# Altium PCB minna_pcb.PcbDoc (part 1 of 2)
Units mil, origin at the board's own origin, x right, y up, seen from the top; angles counter-clockwise.
Board outline 3700 x 2200 mil, 4 copper layers (Top Layer, Power Plane, Ground Plane, Bottom Layer), stack 61.6 mil thick; 144 components, 126 nets, 666 pads, 364 vias.
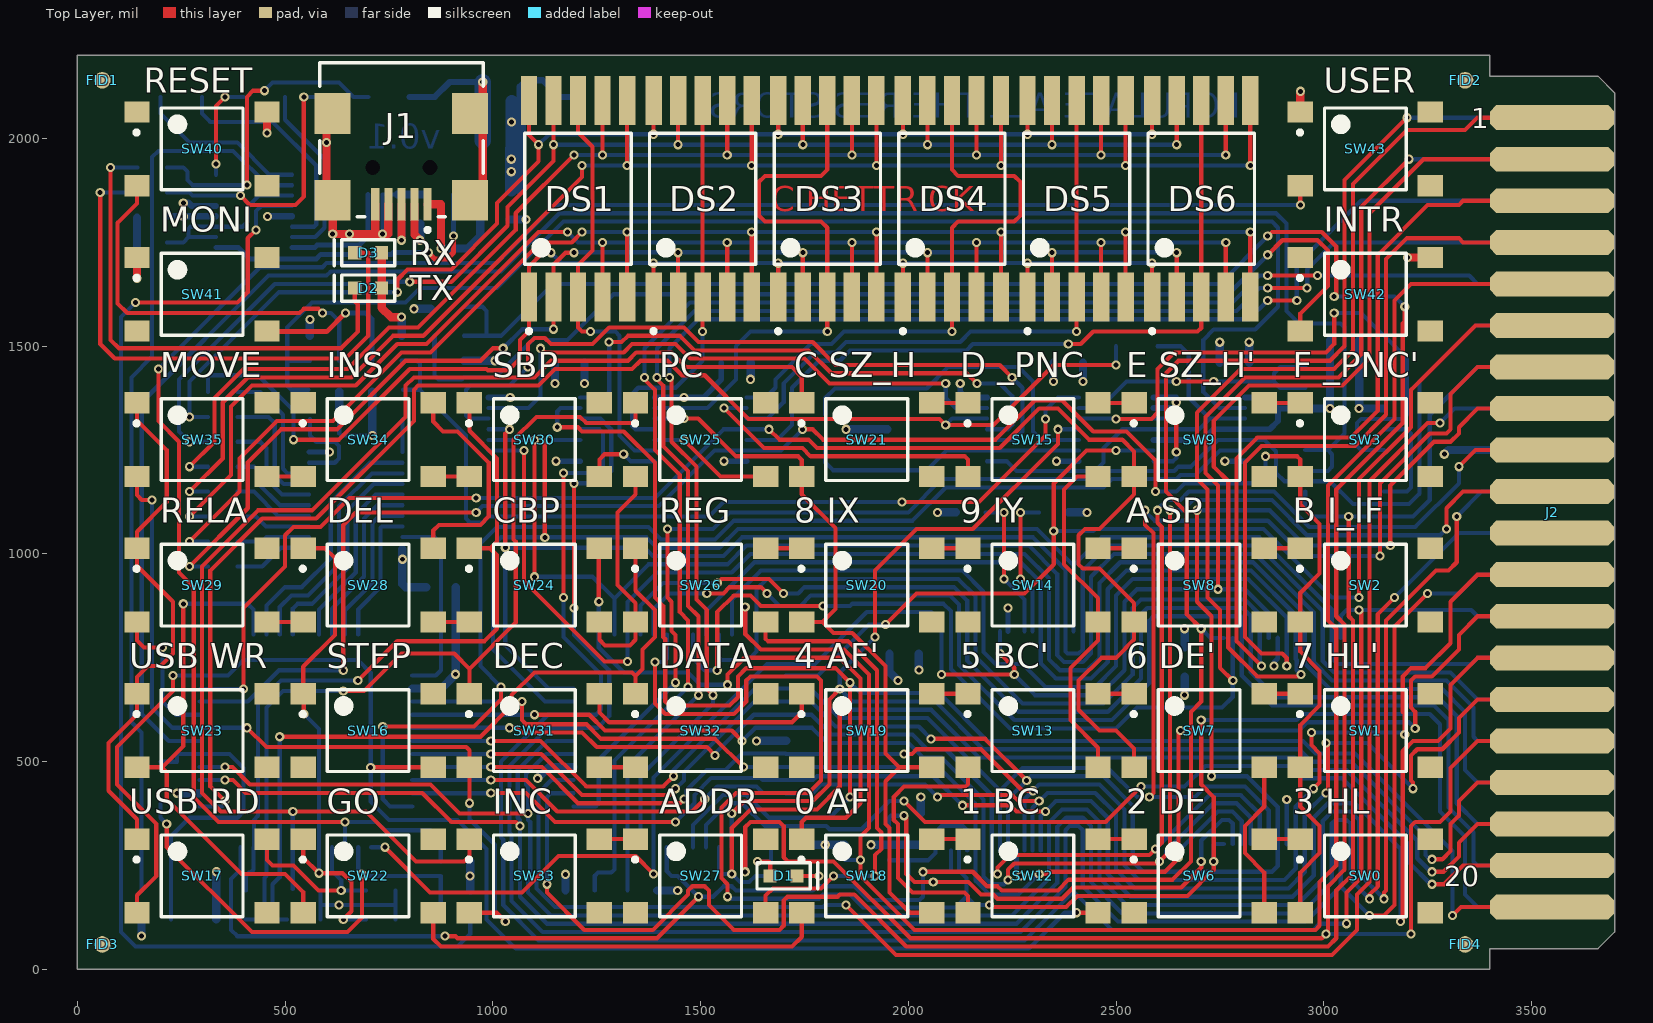
[diagram p0: Top Layer view]
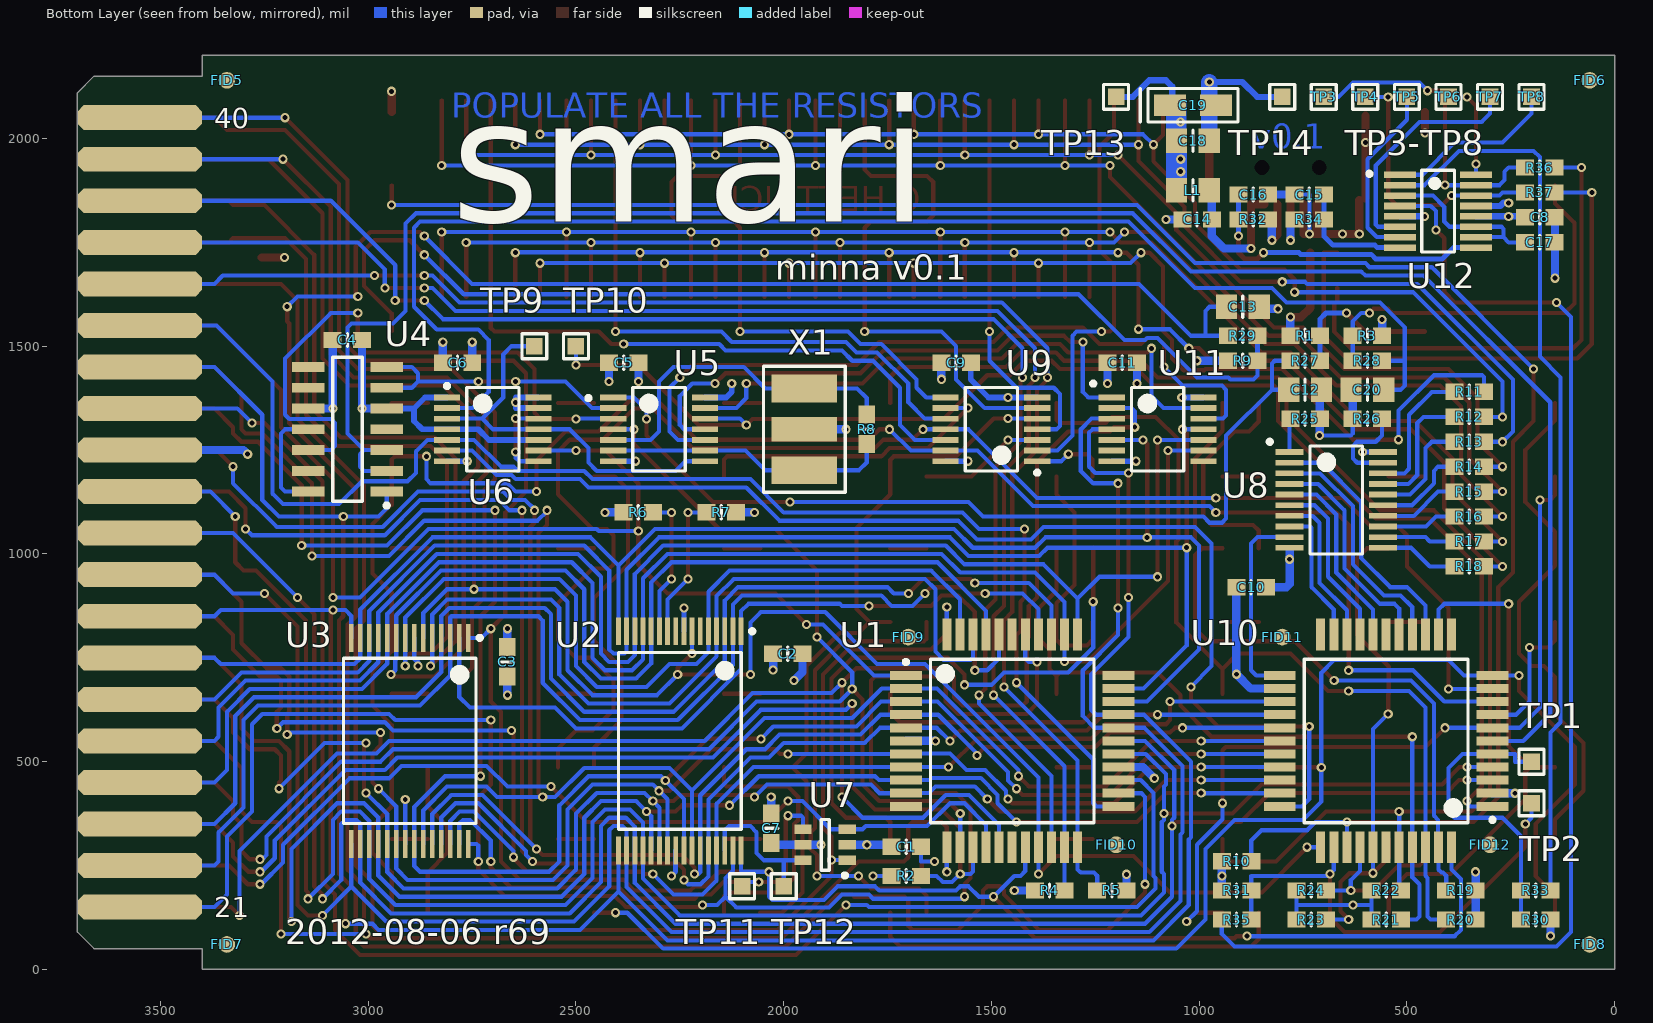
[diagram p1: Bottom Layer view, seen from below]
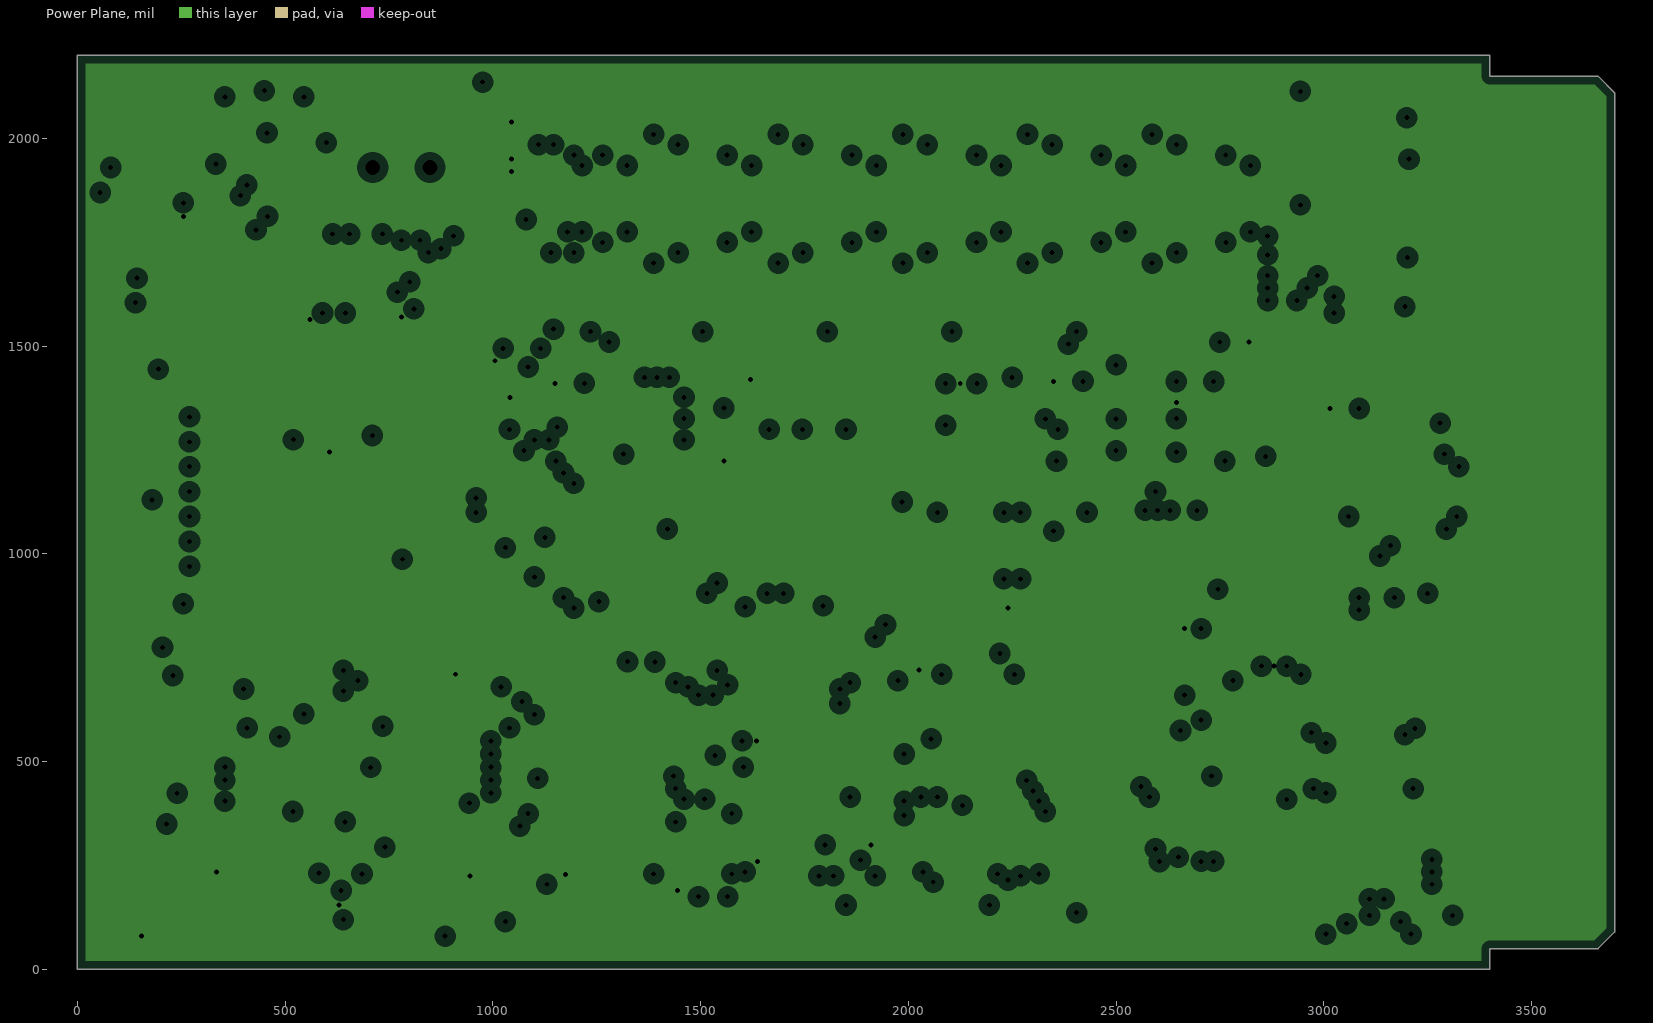
[diagram p2: Power Plane, clearances drawn from the general rule]
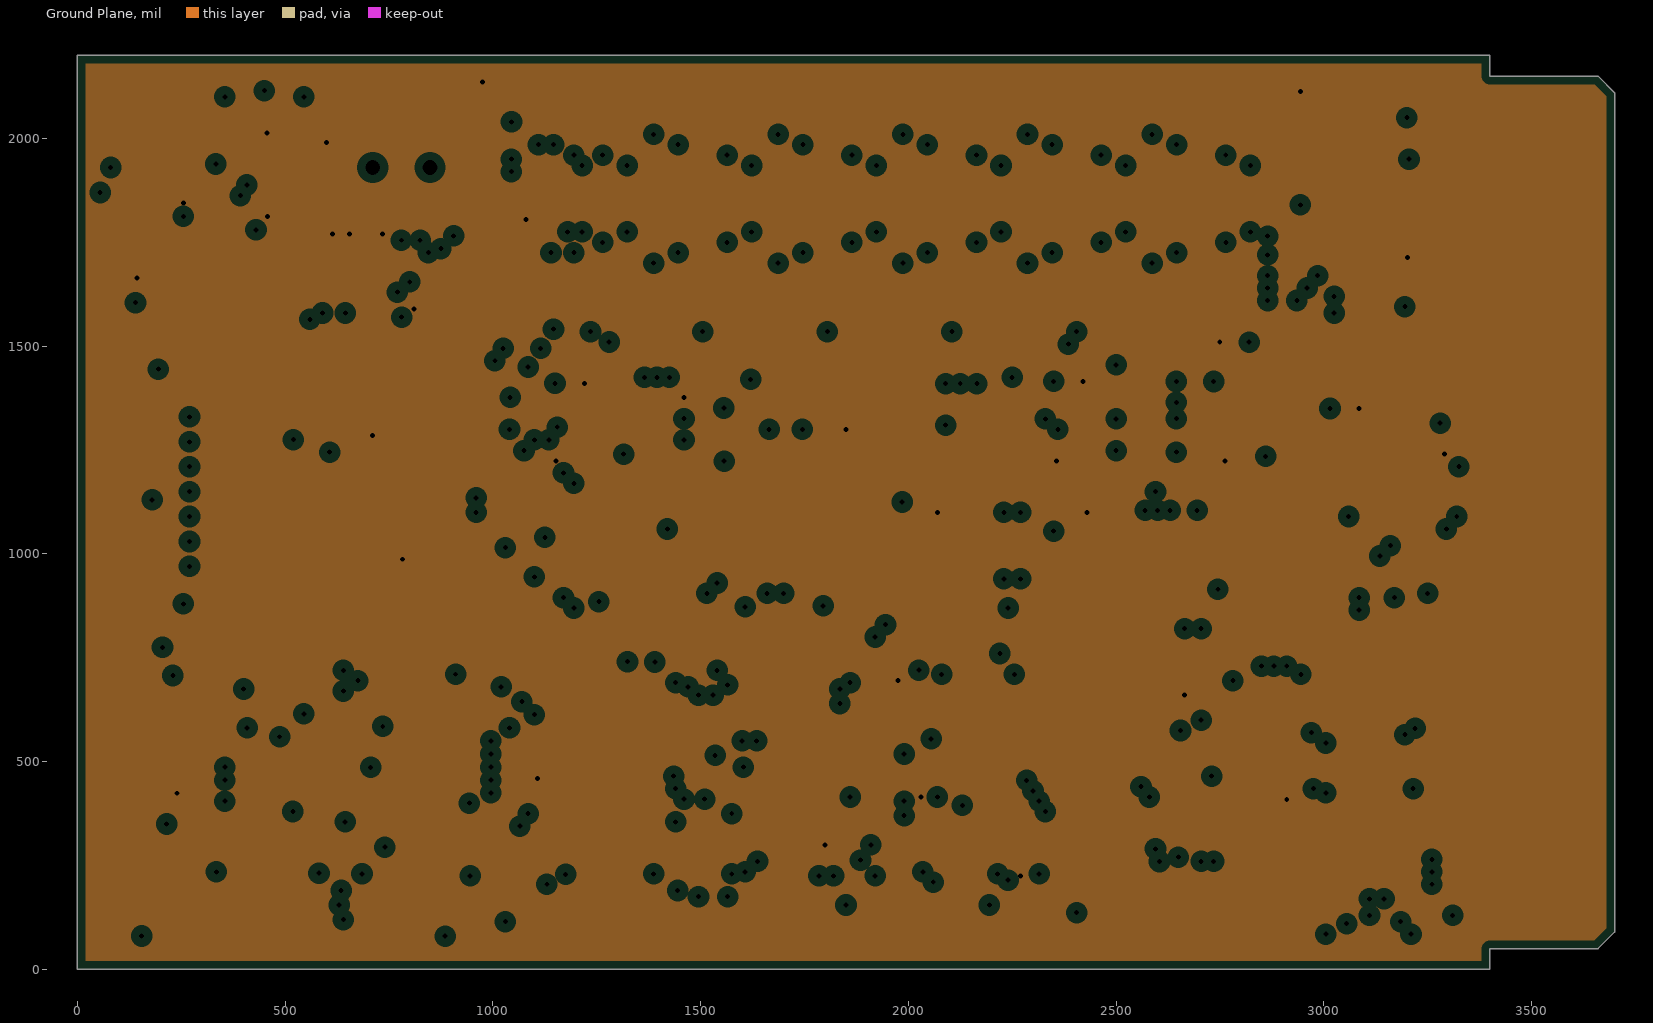
[diagram p3: Ground Plane, clearances drawn from the general rule]

## Layer stack, top to bottom
Top Layer: signal copper 2.1
Dielectric: core 14, FR-4, Dk 4.2
Power Plane: plane copper 0.7, net VCC
Dielectric: prepreg 28, FR-4, Dk 4.2
Ground Plane: plane copper 0.7, net GND
Dielectric: core 14, FR-4, Dk 4.2
Bottom Layer: signal copper 2.1

## Board outline
0,0 3400,0 3400,50 3660,50 3700,90 3700,2110 3660,2150 3400,2150 3400,2200 0,2200 0,0

## Design rules (kind name [scope] priority, off if disabled: settings)
AcuteAngle [All] p1 off: minimum=9.00000000000000E+0001
Clearance "Clearance Poly" [All vs (InPolygon)] p1: gap=11.81
Clearance "Clearance All" [All] p2: gap=7
Clearance "Clearance xtal" [(InComponent('X1')) vs InNet('NetR8_1') AND InNet('NetR8_2')] p3: gap=0 // SMD crystal clearance
DiffPairsRouting [All] p1 off: maxlimit=10 minlimit=10 mostfreqgap=10 maxuncoupledlength=500
FabricationTestPointUsage TestPointUsage [All] p1 off: valid=0 allowmultiple=TRUE
FabricationTestpoint Testpoint [(IsPad And (OnTopLayer Or OnBottomLayer))] p1 off: side=3 testpointundercomponent=TRUE minsize=40 maxsize=100 preferedsize=60 minholesize=0 maxholesize=40 preferedholesize=32 testpointgrid=5 allowsidetop=TRUE allowsidebottom=TRUE usegrid=TRUE gridtolerance=0.01
FanoutControl Fanout_BGA [IsBGA] p1 off: bgadir=Out bgaviamode=Centered fanoutstyle=Auto fanoutdirection=Alternating viagrid=1 // Fanout_BGA (Default Rule)
FanoutControl Fanout_LCC [IsLCC] p2 off: bgadir=Out bgaviamode=Centered fanoutstyle=Auto fanoutdirection=Alternating viagrid=1 // Fanout_LCC (Default Rule)
FanoutControl Fanout_SOIC [IsSOIC] p3 off: bgadir=Out bgaviamode=Centered fanoutstyle=Auto fanoutdirection=Alternating viagrid=1 // Fanout_SOIC (Default Rule)
FanoutControl Fanout_Small [(CompPinCount < 5)] p4 off: bgadir=Out bgaviamode=Centered fanoutstyle=Auto fanoutdirection=OutThenIn viagrid=1 // Fanout_Small (Default Rule)
FanoutControl Fanout_Default [All] p5 off: bgadir=Out bgaviamode=Centered fanoutstyle=Auto fanoutdirection=Alternating viagrid=1 // Fanout_Default (Default Rule)
Height [All] p1 off: minheight=0 maxheight=1000 prefheight=500
HoleSize [All] p1: absolutevalues=TRUE maxlimit=250 minlimit=10 maxpercent=80.000 minpercent=20.000
MinimumAnnularRing "MinimumAnnularRing Via" [(IsVia)] p1: minimumring=5
MinimumAnnularRing "MinimumAnnularRing Pad" [All] p2: minimumring=10
MinimumSolderMaskSliver [All] p1: minsoldermaskwidth=4
PlaneClearance PlaneClearance_1 [ISVIA] p1: clearance=15
PlaneClearance [All] p2: clearance=20
PlaneConnect "PlaneConnect Via" [(IsVia)] p1: planeconnectstyle=Direct reliefexpansion=20 reliefentries=4 reliefconductorwidth=10 reliefairgap=10
PlaneConnect "PlaneConnect Pad" [All] p2: planeconnectstyle=Relief reliefexpansion=15 reliefentries=4 reliefconductorwidth=15 reliefairgap=15
PolygonConnect [All] p1: connectstyle=Relief reliefconductorwidth=10 reliefentries=4 polygonreliefangle="90 Angle"
RoutingCorners [All] p1 off: cornerstyle=45-Degree minsetback=100 maxsetback=100
RoutingPriority [All] p1: routingpriority=1
RoutingVias [All] p1: holewidth=12 width=22 viastyle="Through Hole" minholewidth=12 minwidth=22 maxholewidth=12 maxwidth=22
SMDToCorner [All] p1: distance=90000
SilkscreenOverComponentPads [All] p1: minsilkscreentomaskgap=5
SolderMaskExpansion SolderMaskExpansion_VIA [Isvia] p1: expansion=-50
SolderMaskExpansion [All] p2: expansion=0
Width "Width Power" [InNetClass('Power')] p1: maxlimit=100 minlimit=20 preferedwidth=50
Width [All] p2: maxlimit=100 minlimit=10 preferedwidth=15
12 further rules are at their usual default settings.

## Classes and differential pairs
component class minna_schematic_cpu: C1 C2 C3 C4 C5 C6 C7 C8 C9 C10 C11 C12 C13 C18 C19 C20 D1 FID1 FID2 FID3 FID4 FID5 FID6 FID7 FID8 FID9 FID10 FID11 FID12 J2 R1 R2 R3 R4 R5 R6 R7 R8 R9 R10 R27 R28 R29 SW40 SW41 SW42 SW43 TP9 TP10 TP11 TP12 U1 U2 U3 U4 U5 U6 U7 U11 X1
component class minna_schematic_io: C14 C15 C16 C17 C?? D1 D3 D?? DS1 DS2 DS3 DS4 DS5 DS6 J1 L1 R11 R12 R13 R14 R15 R16 R17 R18 R19 R20 R21 R22 R23 R24 R25 R26 R30 R31 R32 R33 R34 R35 R36 R37 R?? SW0 SW1 SW2 SW3 SW6 SW7 SW8 SW9 SW12 SW13 SW14 SW15 SW16 SW17 SW18 SW19 SW20 SW21 SW22 SW23 SW24 SW25 SW26 SW27 SW28 SW29 SW30 SW31 SW32 SW33 SW34 SW35 TP1 TP2 TP3 TP4 TP5 TP6 TP7 TP8 TP13 TP14 U8 U9 U10 U12

## Components (designator, comment, footprint, x,y, rotation, side; value= is the part's Value field where it differs from the comment)
C1 "0.1uF" 0603 1705,295 r180 bottom
C2 "0.1uF" 0603 1990,760 r0 bottom
C3 "0.1uF" 0603 2665,740 r90 bottom
C4 "0.1uF" 0603 3050,1515 r180 bottom
C5 "0.1uF" 0603 2385,1460 r180 bottom
C6 "0.1uF" 0603 2785,1460 r0 bottom
C7 "0.1uF" 0603 2030,340 r270 bottom
C8 "0.1uF" 0603 180,1810 r0 bottom
C9 "0.1uF" 0603 1585,1460 r0 bottom
C10 "0.1uF" 0603 875,920 r0 bottom
C11 "0.1uF" 0603 1185,1460 r180 bottom
C12 "1.0uF" 0805 745,1395 r0 bottom
C13 "1.0uF" 0805 895,1595 r0 bottom
C14 "10nF" 0603 1005,1805 r0 bottom
C15 "47pF" 0603 735,1865 r0 bottom
C16 "47pF" 0603 870,1865 r180 bottom
C17 "0.1uF" 0603 180,1750 r0 bottom
C18 "1.0uF" 0805 1015,1995 r180 bottom
C19 "10uF" 1206_A 1015,2080 r180 bottom
C20 "1.0uF" 0805 595,1395 r180 bottom
D1 "HALT" APG1608 1700,225 r0 top
D2 "TX" APG1608 700,1640 r180 top
D3 "RX" APG1608 700,1725 r180 top
DS1 "ACSC03-41EWA-F01" ACSC03-41EWA-F01 1205,1855 r0 top
DS2 "ACSC03-41EWA-F01" ACSC03-41EWA-F01 1505,1855 r0 top
DS3 "ACSC03-41EWA-F01" ACSC03-41EWA-F01 1805,1855 r0 top
DS4 "ACSC03-41EWA-F01" ACSC03-41EWA-F01 2105,1855 r0 top
DS5 "ACSC03-41EWA-F01" ACSC03-41EWA-F01 2405,1855 r0 top
DS6 "ACSC03-41EWA-F01" ACSC03-41EWA-F01 2705,1855 r0 top
FID1 "Fiducial" FIDUCIAL 60,2140 r90 top
FID2 "Fiducial" FIDUCIAL 3340,2140 r90 top
FID3 "Fiducial" FIDUCIAL 60,60 r90 top
FID4 "Fiducial" FIDUCIAL 3340,60 r90 top
FID5 "Fiducial" FIDUCIAL 3340,2140 r90 bottom
FID6 "Fiducial" FIDUCIAL 60,2140 r90 bottom
FID7 "Fiducial" FIDUCIAL 3340,60 r90 bottom
FID8 "Fiducial" FIDUCIAL 60,60 r90 bottom
FID9 "Fiducial" FIDUCIAL 1700,800 r90 bottom
FID10 "Fiducial" FIDUCIAL 1200,300 r90 bottom
FID11 "Fiducial" FIDUCIAL 800,800 r90 bottom
FID12 "Fiducial" FIDUCIAL 300,300 r90 bottom
J1 "UX60-MB-5ST" UX60-MB-5ST 780,1930 r90 top
J2 "CWR-170-40-0000" "CARD EDGE 40 PIN" 3550,1100 r90 top
L1 "MI0805K601R-10" 0805 1015,1875 r0 bottom
R1 "47.0K" 0603 745,1525 r0 bottom
R2 "10K" 0603 1705,225 r180 bottom
R3 "47.0K" 0603 595,1525 r180 bottom
R4 "10K" 0603 1360,190 r180 bottom
R5 "10K" 0603 1210,190 r0 bottom
R6 "10K" 0603 2350,1100 r180 bottom
R7 "10K" 0603 2150,1100 r0 bottom
R8 "1.0M" 0603 1800,1300 r270 bottom
R9 "47.0K" 0603 895,1465 r0 bottom
R10 "10K" 0603 910,260 r0 bottom
R11 "680R" 0603 350,1390 r180 bottom
R12 "680R" 0603 350,1330 r180 bottom
R13 "680R" 0603 350,1270 r180 bottom
R14 "680R" 0603 350,1210 r180 bottom
R15 "680R" 0603 350,1150 r180 bottom
R16 "680R" 0603 350,1090 r180 bottom
R17 "680R" 0603 350,1030 r180 bottom
R18 "680R" 0603 350,970 r180 bottom
R19 "10K" 0603 370,190 r180 bottom
R20 "10K" 0603 370,120 r180 bottom
R21 "10K" 0603 550,120 r0 bottom
R22 "10K" 0603 550,190 r0 bottom
R23 "10K" 0603 730,120 r0 bottom
R24 "10K" 0603 730,190 r0 bottom
R25 "10K" 0603 745,1325 r180 bottom
R26 "10K" 0603 595,1325 r0 bottom
R27 "18.0K" 0603 745,1465 r0 bottom
R28 "18.0K" 0603 595,1465 r180 bottom
R29 "18.0K" 0603 895,1525 r0 bottom
R30 "1.0K" 0603 190,120 r180 bottom
R31 "1.0K" 0603 910,190 r0 bottom
R32 "27R" 0603 870,1805 r0 bottom
R33 "160R" 0603 190,190 r0 bottom
R34 "27R" 0603 735,1805 r180 bottom
R35 "160R" 0603 910,120 r180 bottom
R36 "680R" 0603 180,1930 r180 bottom
R37 "680R" 0603 180,1870 r0 bottom
SW0 "3 HL" "PTS645SM43SMTR LFS" 3100,225 r0 top
SW1 "7 HL'" "PTS645SM43SMTR LFS" 3100,575 r0 top
SW2 "B I_IF" "PTS645SM43SMTR LFS" 3100,925 r0 top
SW3 "F _PNC'" "PTS645SM43SMTR LFS" 3100,1275 r0 top
SW6 "2 DE" "PTS645SM43SMTR LFS" 2700,225 r0 top
SW7 "6 DE'" "PTS645SM43SMTR LFS" 2700,575 r0 top
SW8 "A SP" "PTS645SM43SMTR LFS" 2700,925 r0 top
SW9 "E SZ_H'" "PTS645SM43SMTR LFS" 2700,1275 r0 top
SW12 "1 BC" "PTS645SM43SMTR LFS" 2300,225 r0 top
SW13 "5 BC'" "PTS645SM43SMTR LFS" 2300,575 r0 top
SW14 "9 IY" "PTS645SM43SMTR LFS" 2300,925 r0 top
SW15 "D _PNC" "PTS645SM43SMTR LFS" 2300,1275 r0 top
SW16 "STEP" "PTS645SM43SMTR LFS" 700,575 r0 top
SW17 "USB RD" "PTS645SM43SMTR LFS" 300,225 r0 top
SW18 "0 AF" "PTS645SM43SMTR LFS" 1900,225 r0 top
SW19 "4 AF'" "PTS645SM43SMTR LFS" 1900,575 r0 top
SW20 "8 IX" "PTS645SM43SMTR LFS" 1900,925 r0 top
SW21 "C SZ_H" "PTS645SM43SMTR LFS" 1900,1275 r0 top
SW22 "GO" "PTS645SM43SMTR LFS" 700,225 r0 top
SW23 "USB WR" "PTS645SM43SMTR LFS" 300,575 r0 top
SW24 "CBP" "PTS645SM43SMTR LFS" 1100,925 r0 top
SW25 "PC" "PTS645SM43SMTR LFS" 1500,1275 r0 top
SW26 "REG" "PTS645SM43SMTR LFS" 1500,925 r0 top
SW27 "ADDR" "PTS645SM43SMTR LFS" 1500,225 r0 top
SW28 "DEL" "PTS645SM43SMTR LFS" 700,925 r0 top
SW29 "RELA" "PTS645SM43SMTR LFS" 300,925 r0 top
SW30 "SBP" "PTS645SM43SMTR LFS" 1100,1275 r0 top
SW31 "DEC" "PTS645SM43SMTR LFS" 1100,575 r0 top
SW32 "DATA" "PTS645SM43SMTR LFS" 1500,575 r0 top
SW33 "INC" "PTS645SM43SMTR LFS" 1100,225 r0 top locked
SW34 "INS" "PTS645SM43SMTR LFS" 700,1275 r0 top
SW35 "MOVE" "PTS645SM43SMTR LFS" 300,1275 r0 top
SW40 "RESET" "PTS645SM43SMTR LFS" 300,1975 r0 top
SW41 "MONI" "PTS645SM43SMTR LFS" 300,1625 r0 top
SW42 "INTR" "PTS645SM43SMTR LFS" 3100,1625 r0 top
SW43 "USER" "PTS645SM43SMTR LFS" 3100,1975 r0 top
TP1 "I2CSCL" TP_ICT 200,500 r90 bottom
TP2 "I2CSDA" TP_ICT 200,400 r90 bottom
TP3 "CBUS0" TP_ICT 700,2100 r90 bottom
TP4 "CBUS1" TP_ICT 600,2100 r90 bottom
TP5 "CBUS2" TP_ICT 500,2100 r90 bottom
TP6 "CBUS3" TP_ICT 400,2100 r90 bottom
TP7 "CBUS4" TP_ICT 300,2100 r90 bottom
TP8 "CBUS5" TP_ICT 200,2100 r90 bottom
TP9 "OSCCLK" TP_ICT 2600,1500 r180 bottom
TP10 "#8255CS" TP_ICT 2500,1500 r90 bottom
TP11 "#RAMCE" TP_ICT 2100,200 r90 bottom
TP12 "#FLASHCE" TP_ICT 2000,200 r90 bottom
TP13 "VCC" TP_ICT 1200,2100 r90 bottom
TP14 "GND" TP_ICT 800,2100 r90 bottom
U1 "Z84C0010AEG" LQFP-44 1450,550 r180 bottom locked
U2 "SST39SF010A-70-4C-WHE" SST39SF010A-70-4C-WHE 2250,550 r270 bottom locked
U3 "IS62C256AL-45TLI" IS62C256AL-45TLI 2900,550 r270 bottom locked
U4 "SN74LS90DG4" DO14 3050,1300 r0 bottom
U5 "SN74HC14PWR" PW014 2300,1300 r180 bottom
U6 "SN74HC74PWR" PW014 2700,1300 r180 bottom
U7 "SN74LVC1G19DBVR" "SOT-23-6 DBV R-PDSO-G6" 1900,300 r0 bottom locked
U8 "SN74HC541PWR" PW020 670,1130 r180 bottom
U9 "SN74HC14PWR" PW014 1500,1300 r0 bottom
U10 "CQ82C55AZ" MQFP-44 550,550 r0 bottom
U11 "CD74HC4002PWR" PW014 1100,1300 r180 bottom
U12 "FT201XS-R" SSOP-16 425,1825 r180 bottom
X1 "AWSCR-3.58MGD-T" AWSCR-MG 1950,1300 r90 bottom

## Footprints (in the part's own frame and the unit in brackets; to place one, negate y for a bottom-side part, rotate by r counter-clockwise, add the part's x,y. Pads: shape width x height; smd on the part's side, far side on the other; paste and mask are expansions set on the pad)
0603 [mm]
  rect 1.1x1 smd: 1(-0.9,0) 2(0.9,0)
  silkscreen extent 0,-0.4 0,0.4, body extent -0.87,-0.47 0.87,0.47, height 0.8
0805 [mm]
  rect 1.3x1.5 smd: 1(-1,0) 2(1,0)
  silkscreen extent 0,-0.65 0,0.65, body extent -1.1,-0.72 1.1,0.72, height 1.27
1206_A [mm]
  rect 1.95x1.3 smd: 1(-1.4,0) 2(1.4,0)
  silkscreen extent -3.23,-1.02 2.75,1.02, body extent -1.6,-0.8 1.6,0.8, height 1.8
ACSC03-41EWA-F01 [mm] "DISPLAY 0.3\" 627NM SGL RED SMD"
  rect 1x3 smd: 1(-3,-6) 2(-1.5,-6) 3(0,-6) 4(1.5,-6) 5(3,-6) 6(3,6) 7(1.5,6) 8(0,6) 9(-1.5,6) 10(-3,6)
  silkscreen extent -3.25,-8.22 3.25,4, body extent -3.65,-6 3.65,6, height 3.75
APG1608 [mm] "1.6mm X 0.8mm SMD LED"
  rect 0.8x0.8 smd: 1(-0.825,0) 2(0.825,0)
  silkscreen extent -1.63,-0.8 2.07,0.8, body extent -0.8,-0.4 0.8,0.4, height 1.8
AWSCR-MG [mm] "CERAMIC RESONATOR 7.4 x 3.4 x 1.8mm 3-SMD"
  rect 1.7x4 smd: 1(-2.5,0) 3(2.5,0)
  rect 1.5x4 smd: 2(0,0)
  silkscreen extent -3.85,-2.5 3.85,2.5, body extent -3.7,-1.7 3.7,1.7, height 1.8
"CARD EDGE 40 PIN" [mil] "CARD EDGE 40 PIN FOR CWR-170-40-0000"
  oct 60x300 smd paste-39.37: 1(950,0) 2(850,0) 3(750,0) 4(650,0) 5(550,0) 6(450,0) 7(350,0) 8(250,0) 9(150,0) 10(50,0) 11(-50,0) 12(-150,0) 13(-250,0) 14(-350,0) 15(-450,0) 16(-550,0) 17(-650,0) 18(-750,0) 19(-850,0) 20(-950,0)
  oct 60x300 smd far side paste-39.37: 21(-950,0) 22(-850,0) 23(-750,0) 24(-650,0) 25(-550,0) 26(-450,0) 27(-350,0) 28(-250,0) 29(-150,0) 30(-50,0) 31(50,0) 32(150,0) 33(250,0) 34(350,0) 35(450,0) 36(550,0) 37(650,0) 38(750,0) 39(850,0) 40(950,0)
DO14 [mm]
  rect 2x0.6 smd: 1(-2.4,3.81) 2(-2.4,2.54) 3(-2.4,1.27) 4(-2.4,0) 5(-2.4,-1.27) 6(-2.4,-2.54) 7(-2.4,-3.81) 8(2.4,-3.81) 9(2.4,-2.54) 10(2.4,-1.27) 11(2.4,0) 12(2.4,1.27) 13(2.4,2.54) 14(2.4,3.81)
  silkscreen extent -2.52,-4.4 0.9,4.78, body extent -2,-4.38 2,4.38, height 1.75
FIDUCIAL [mil] "FIDUCIAL"
  round 40 smd paste-40 mask+20: FID(0,0)
IS62C256AL-45TLI [mm] "IC SRAM 256KBIT 45NS 28TSOP"
  rect 1.7x0.3 smd: 1(-6.3,3.575) 2(-6.3,3.025) 3(-6.3,2.475) 4(-6.3,1.925) 5(-6.3,1.375) 6(-6.3,0.825) 7(-6.3,0.275) 8(-6.3,-0.275) 9(-6.3,-0.825) 10(-6.3,-1.375) 11(-6.3,-1.925) 12(-6.3,-2.475) 13(-6.3,-3.025) 14(-6.3,-3.575) 15(6.3,-3.575) 16(6.3,-3.025) 17(6.3,-2.475) 18(6.3,-1.925) 19(6.3,-1.375) 20(6.3,-0.825) 21(6.3,-0.275) 22(6.3,0.275) 23(6.3,0.825) 24(6.3,1.375) 25(6.3,1.925) 26(6.3,2.475) 27(6.3,3.025) 28(6.3,3.575)
  silkscreen extent -6.42,-4.05 5.05,4.4, body extent -5.95,-4.05 5.95,4.05, height 1.2
LQFP-44 [mm] "44-Lead Plastic Low-Profile Quad Flat Package (10 x 10 x 1.4 mm)"
  rect 1.95x0.55 smd: 1(-6.5,4) 2(-6.5,3.2) 3(-6.5,2.4) 4(-6.5,1.6) 5(-6.5,0.8) 6(-6.5,0) 7(-6.5,-0.8) 8(-6.5,-1.6) 9(-6.5,-2.4) 10(-6.5,-3.2) 11(-6.5,-4) 23(6.5,-4) 24(6.5,-3.2) 25(6.5,-2.4) 26(6.5,-1.6) 27(6.5,-0.8) 28(6.5,0) 29(6.5,0.8) 30(6.5,1.6) 31(6.5,2.4) 32(6.5,3.2) 33(6.5,4)
  rect 0.55x1.95 smd: 12(-4,-6.5) 13(-3.2,-6.5) 14(-2.4,-6.5) 15(-1.6,-6.5) 16(-0.8,-6.5) 17(0,-6.5) 18(0.8,-6.5) 19(1.6,-6.5) 20(2.4,-6.5) 21(3.2,-6.5) 22(4,-6.5) 34(4,6.5) 35(3.2,6.5) 36(2.4,6.5) 37(1.6,6.5) 38(0.8,6.5) 39(0,6.5) 40(-0.8,6.5) 41(-1.6,6.5) 42(-2.4,6.5) 43(-3.2,6.5) 44(-4,6.5)
  silkscreen extent -6.63,-5 5,5, body extent -5,-5 5,5, height 1.6
MQFP-44 [mm] "44 LEAD METRIC PLASTIC QUAD FLATPACK 10x10"
  rect 1.95x0.55 smd: 1(-6.5,4) 2(-6.5,3.2) 3(-6.5,2.4) 4(-6.5,1.6) 5(-6.5,0.8) 6(-6.5,0) 7(-6.5,-0.8) 8(-6.5,-1.6) 9(-6.5,-2.4) 10(-6.5,-3.2) 11(-6.5,-4) 23(6.5,-4) 24(6.5,-3.2) 25(6.5,-2.4) 26(6.5,-1.6) 27(6.5,-0.8) 28(6.5,0) 29(6.5,0.8) 30(6.5,1.6) 31(6.5,2.4) 32(6.5,3.2) 33(6.5,4)
  rect 0.55x1.95 smd: 12(-4,-6.5) 13(-3.2,-6.5) 14(-2.4,-6.5) 15(-1.6,-6.5) 16(-0.8,-6.5) 17(0,-6.5) 18(0.8,-6.5) 19(1.6,-6.5) 20(2.4,-6.5) 21(3.2,-6.5) 22(4,-6.5) 34(4,6.5) 35(3.2,6.5) 36(2.4,6.5) 37(1.6,6.5) 38(0.8,6.5) 39(0,6.5) 40(-0.8,6.5) 41(-1.6,6.5) 42(-2.4,6.5) 43(-3.2,6.5) 44(-4,6.5)
  silkscreen extent -6.62,-5 5,5, body extent -5,-5 5,5, height 2.45
"PTS645SM43SMTR LFS" [mm] "SWITCH TACT 6MM 160GF H=4.3MM"
  rect 1.55x1.3 smd: 1(-3.975,2.25) 2(3.975,2.25) 3(-3.975,-2.25) 4(3.975,-2.25)
  silkscreen extent -4.12,-2.5 2.5,2.5, body extent -3,-3 3,3, height 4.3
PW014 [mm]
  rect 1.6x0.35 smd: 1(-2.8,1.95) 2(-2.8,1.3) 3(-2.8,0.65) 4(-2.8,0) 5(-2.8,-0.65) 6(-2.8,-1.3) 7(-2.8,-1.95) 8(2.8,-1.95) 9(2.8,-1.3) 10(2.8,-0.65) 11(2.8,0) 12(2.8,0.65) 13(2.8,1.3) 14(2.8,1.95)
  silkscreen extent -4.44,-2.55 1.6,2.55, body extent -2.25,-2.55 2.25,2.55, height 1.2
PW020 [mm]
  rect 1.7x0.35 smd: 1(-2.85,2.925) 2(-2.85,2.275) 3(-2.85,1.625) 4(-2.85,0.975) 5(-2.85,0.325) 6(-2.85,-0.325) 7(-2.85,-0.975) 8(-2.85,-1.625) 9(-2.85,-2.275) 10(-2.85,-2.925) 11(2.85,-2.925) 12(2.85,-2.275) 13(2.85,-1.625) 14(2.85,-0.975) 15(2.85,-0.325) 16(2.85,0.325) 17(2.85,0.975) 18(2.85,1.625) 19(2.85,2.275) 20(2.85,2.925)
  silkscreen extent -4.19,-3.3 1.6,3.68, body extent -2.25,-3.3 2.25,3.3, height 1.2
"SOT-23-6 DBV R-PDSO-G6" [mm] "SOT-23-6 TI DBV"
  rect 1.05x0.6 smd: 1(-1.35,0.95) 2(-1.35,0) 3(-1.35,-0.95) 4(1.35,-0.95) 5(1.35,0) 6(1.35,0.95)
  silkscreen extent -1.32,-1.55 0.25,2, body extent -0.8,-1.45 0.8,1.45, height 1.1
SSOP-16 [mm] "IC USB FS I2C SSOP-16"
  rect 1.95x0.4 smd: 1(-2.325,2.223) 2(-2.325,1.588) 3(-2.325,0.953) 4(-2.325,0.318) 5(-2.325,-0.317) 6(-2.325,-0.952) 7(-2.325,-1.587) 8(-2.325,-2.222) 9(2.325,-2.223) 10(2.325,-1.588) 11(2.325,-0.953) 12(2.325,-0.318) 13(2.325,0.317) 14(2.325,0.952) 15(2.325,1.587) 16(2.325,2.222)
  silkscreen extent -4.32,-2.5 1,2.5, body extent -2,-2.5 2,2.5, height 1.76
SST39SF010A-70-4C-WHE [mm] "IC FLASH MPF 1MBIT 70NS 32TSOP"
  rect 1.7x0.3 smd: 1(-6.7,3.75) 2(-6.7,3.25) 3(-6.7,2.75) 4(-6.7,2.25) 5(-6.7,1.75) 6(-6.7,1.25) 7(-6.7,0.75) 8(-6.7,0.25) 9(-6.7,-0.25) 10(-6.7,-0.75) 11(-6.7,-1.25) 12(-6.7,-1.75) 13(-6.7,-2.25) 14(-6.7,-2.75) 15(-6.7,-3.25) 16(-6.7,-3.75) 17(6.7,-3.75) 18(6.7,-3.25) 19(6.7,-2.75) 20(6.7,-2.25) 21(6.7,-1.75) 22(6.7,-1.25) 23(6.7,-0.75) 24(6.7,-0.25) 25(6.7,0.25) 26(6.7,0.75) 27(6.7,1.25) 28(6.7,1.75) 29(6.7,2.25) 30(6.7,2.75) 31(6.7,3.25) 32(6.7,3.75)
  silkscreen extent -6.82,-3.75 5.4,4.55, body extent -6.2,-4 6.2,4, height 1
TP_ICT [mil] "ICT Test Point"
  rect 40x40 smd paste-40: TP(0,0)
  silkscreen extent -30,-30 30,30
UX60-MB-5ST [mm] "CONN RECEPT MINI USB2.0 5POS"
  rect 2x0.5 smd: 1(-2.25,-1.6) 2(-2.25,-0.8) 3(-2.25,0) 4(-2.25,0.8) 5(-2.25,1.6)
  rect 2.5x2.2 smd: 6(-2,4.2) 7(3.3,4.2) 8(-2,-4.2) 9(3.3,-4.2)
  round 0.6 hole 0.9 unplated: MH1(0,1.75) MH2(0,-1.75)
  silkscreen extent -3.93,-5 6.4,5, body extent -2.6,-3.85 6.4,3.85, height 3.95

## Part data
C1 C2 C3 C4 C5 C6 C7 C8 C9 C10 C11 C17: library part C0603, "CAP .10UF 16V CERAMIC X7R 0603"
C12 C13 C18 C20: library part C0805, "CAP 1.0UF 16V CERAMIC X7R 0805"
C14: library part C0603, "CAP CER 10000PF 50V 10% X7R 0603"
C15 C16: library part C0603, "CAP CER 47PF 50V 5% NP0 0603"
C19: library part T491A, "CAPACITOR TANT 10UF 10V 10% SMD"
D1 D2 D3: library part LTST-C190KRKT, "LED SUPER RED CLEAR 0603 SMD"
DS1 DS2 DS3 DS4 DS5 DS6: "DISPLAY 0.3\" 627NM SGL RED SMD"
FID1 FID2 FID3 FID4 FID5 FID6 FID7 FID8 FID9 FID10 FID11 FID12: library part FIDUCIAL, "FIDUCIAL"
J1: "CONN RECEPT MINI USB2.0 5POS"
J2: "CONN CARD EDGE 40PIN GOLD"
L1: "FERRITE CHIP POWER 600 OHM SMD"
R1 R3 R9: library part MCR03EZPFX, "RES 47.0K OHM 1/10W 1% 0603 SMD"
R2 R4 R5 R6 R7 R10 R19 R20 R21 R22 R23 R24 R25 R26: library part MCR03EZPFX, "RES 10.0K OHM 1/10W 1% 0603 SMD"
R8: library part MCR03EZPFX, "RES 1.00M OHM 1/10W 1% 0603 SMD"
R11 R12 R13 R14 R15 R16 R17 R18 R36 R37: library part MCR03EZPFX, "RES 680 OHM 1/10W 1% 0603 SMD"
R27 R28 R29: library part MCR03EZPFX, "RES 18.0K OHM 1/10W 1% 0603 SMD"
R30 R31: library part ERJ-3EKF1002V, "RES 1.00K OHM 1/10W 1% 0603 SMD"
R32 R34: library part ERJ-3EKF1002V, "RES 27.0 OHM 1/10W 1% 0603 SMD"
R33 R35: library part ERJ-3EKF1002V, "RES 160 OHM 1/10W 1% 0603 SMD"
SW0 SW1 SW2 SW3 SW6 SW7 SW8 SW9 SW12 SW13 SW14 SW15 SW16 SW17 SW18 SW19 SW20 SW21 SW22 SW23 SW24 SW25 SW26 SW27 SW28 SW29 SW30 SW31 SW32 SW33 SW34 SW35 SW40 SW41 SW42 SW43: library part "PTS645SM43SMTR LFS", "SWITCH TACT 6MM 160GF H=4.3MM"
TP1 TP2 TP3 TP4 TP5 TP6 TP7 TP8 TP9 TP10 TP11 TP12 TP13 TP14: library part TP_ICT, "TEST POINT"
U1: "IC Z80 CPU CMOS 10MHZ 44LQFP"
U2: "IC FLASH MPF 1MBIT 70NS 32TSOP"
U3: "IC SRAM 256KBIT 45NS 28TSOP"
U4: "IC COUNTER DECADE 4BIT 14SOIC"
U5 U9: "IC HEX SCHMITT-TRIG INV 14-TSSOP"
U6: "IC DUAL F-F W/CLR/PRESET 14TSSOP"
U7: "IC MUX/DECODER SNGL 1OF2 SOT23-6"
U8: "IC BUFF/DVR TRI-ST 8BIT 20TSSOP"
U10: library part CMQ82C55AZ, "IC I/O EXPANDER 24B 44MQFP"
U11: "IC DUAL 4-IN NOR GATE 14TSSOP"
U12: "IC USB FS I2C SSOP-16"
X1: "RESONATOR CER 3.58MHZ W/CAP SMD"

## Via types
v1: diameter 22, hole 12, Top Layer to Bottom Layer, 364 vias

## Nets (pads, with @x,y where several pads share a name; then routed paths per layer and width w, separated by ;. In a path a pad name is that pad's centre, name@x,y a point inside that pad or via, vN(x,y) a via of type N, cw(c..) or ccw(c..) an arc to the next point about the centre after c; other vN are vias at no path point)
8255B\R\E\A\K\: U4.2 U4.3 U10.6 | length 4715.2
  Bottom Layer w10: U10.6@294.09,550 220,550 155,615 155,1365 460,1670 600,1670 610,1680 1020,1680 1160,1820 2885,1820 2910,1795 2910,1585 2940,1555 3040,1555 3050,1545 3050,1290 3010,1250 ; U4.2@2955.51,1200 3010,1200 3020,1210 3020,1240 3010,1250 ; U4.3@2955.51,1250 3010,1250
8255C\S\: TP10.TP U5.12 U10.1 | length 3347.1
  Top Layer w10: v1(355,405) 320,440 320,960 445,1085 575,1085 810,1320 810,1395 820,1405 1110,1405 1150,1445 1335,1445 1355,1465 1420,1465 1455,1430 1510,1430 1615,1325 2075,1325 v1(2090,1310) 2205,1310 2350,1455 v1(2500,1455)
  Bottom Layer w10: U10.1@294.09,392.52 347.52,392.52 355,400 v1(355,405) ; v1(2090,1310) 2105.59,1325.59 U5.12@2189.76,1325.59 ; v1(2500,1455) TP10.TP@2500,1500
8255RESET: U6.6 U10.33 | length 2918.6
  Top Layer w10: v1(735,585) 955,585 1020,650 v1(1020,680)
  Bottom Layer w10: v1(735,585) 735,410 752.48,392.52 U10.33@805.91,392.52 ; v1(1020,680) 970,730 970,1025 1010,1065 1375,1065 1405,1035 1535,1035 1580,1080 2010,1080 2090,1160 2470,1160 2490,1180 2645,1180 2655,1190 2691.18,1190 2750,1248.82 U6.6@2810.24,1248.82
A0: J2.31 U1.27 U2.20 U3.17 U10.4 | length 5252.8
  Top Layer w10: v1(355,487.01) 372.99,487.01 415,445 850,445 920,375 v1@1080,375 ; v1(3145,170) 3145,185 3150,190 3150,840 3270,960 3300,960 3320,980 v1(3320,1090)
  Bottom Layer w10: U10.4@294.09,487.01 v1(355,487.01) ; U1.27@1194.09,518.5 1128.5,518.5 1080,470 1080,445 1085,440 v1(1085,375) 1085,360 1090,355 1090,235 1085,230 1085,185 1140,130 2250,130 2338.58,218.58 U2.20@2338.58,286.22 2338.58,353.58 2370,385 2430,385 2460,355 2460,220 2525,155 2935,155 2997.44,217.44 U3.17@2997.44,301.97 2997.44,357.44 3020,380 3065,380 3085,360 3085,230 v1(3145,170) ; v1(3320,1090) 3380,1150 J2.31@3500,1150
A1: J2.30 U1.28 U2.19 U3.16 U10.3 | length 5196
  Top Layer w10: v1(355,455.51) 374.49,455.51 405,425 830,425 900,355 1055,355 v1(1065,345) ; v1(3110,170) 3110,180 3130,200 3130,855 v1(3170,895)
  Bottom Layer w10: U10.3@294.09,455.51 v1(355,455.51) ; U1.28@1194.09,550 1130,550 1060,480 1060,365 1065,360 v1(1065,345) 1065,175 1130,110 2260,110 2358.27,208.27 U2.19@2358.27,286.22 2358.27,343.27 2380,365 2420,365 2440,345 2440,210 2515,135 2945,135 3019.09,209.09 U3.16@3019.09,301.97 3019.09,351.09 3028,360 3055,360 3065,350 3065,215 v1(3110,170) ; v1(3170,895) 3325,1050 J2.30@3500,1050
A2: J2.29 U1.29 U2.18 U3.15 U11.3 | length 5244.5
  Top Layer w10: v1(1195,870) v1(1195,1170) ; v1(3110,130) 3145,130 3170,155 3170,825 v1(3250,905)
  Bottom Layer w10: v1(1195,870) 1195,805 1280,720 1280,610 1251.5,581.5 U1.29@1194.09,581.5 1131.5,581.5 1040,490 1040,330 1045,325 1045,165 1120,90 2270,90 2377.95,197.95 U2.18@2377.95,286.22 2377.95,334.95 2388,345 2410,345 2420,335 2420,200 2505,115 2956.5,115 3040.75,199.25 ; v1(1195,1170) 1255,1170 1285,1200 1285,1300 1259.41,1325.59 U11.3@1210.24,1325.59 ; U3.15@3040.75,301.97 3040.75,199.25 ; v1(3110,130) 3040.75,199.25 ; v1(3250,905) 3325,905 3370,950 J2.29@3500,950
A3: J2.28 U1.30 U2.17 U3.14 U11.4 | length 5040.2
  Top Layer w10: v1(1170,895) v1(1170,1195) ; v1(3055,110) 3055,185 3090,220 3090,860 v1(3085,865)
  Bottom Layer w10: v1(1170,895) 1170,800 1260,710 1260,625 1247.99,612.99 U1.30@1194.09,612.99 1132.99,612.99 1020,500 1020,318 1025,313 1025,155 1110,70 2280,70 2397.64,187.64 ; v1(1170,1195) 1250,1195 1265,1210 1265,1292 1257,1300 U11.4@1210.24,1300 ; U2.17@2397.64,286.22 2397.64,187.64 ; U3.14@3040.75,798.03 3040.75,850.75 3055,865 v1(3085,865) 3355,865 3370,850 J2.28@3500,850 ; v1(3055,110) 2990,110 2975,95 2490.28,95 2397.64,187.64
A4: J2.27 U1.31 U2.16 U3.13 U11.5 | length 3771.1
  Top Layer w10: v1(1125,1040) 1125,1264.41 v1(1135,1274.41)
  Bottom Layer w10: v1(1135,1274.41) U11.5@1210.24,1274.41 ; U1.31@1194.09,644.49 1125.51,644.49 1000,770 1000,1020 1020,1040 v1(1125,1040) 1370,1040 1395,1015 1545,1015 1590,1060 2310,1060 2397.64,972.36 ; U2.16@2397.64,813.78 2397.64,972.36 ; J2.27@3500,750 3370,750 3355,735 3033,735 3019.09,748.91 U3.13@3019.09,798.03 3019.09,865.91 2845,1040 2465.28,1040 2460.28,1035 2397.64,972.36
A5: J2.26 U1.32 U2.15 U3.12 U11.11 | length 3952.4
  Top Layer w10: v1(1030,1015) 1030,1290 v1(1040,1300)
  Bottom Layer w10: U11.11@989.76,1300 v1(1040,1300) ; U1.32@1194.09,675.98 1134.02,675.98 1030,780 v1(1030,1015) 1365,1015 1385,995 1555,995 1600,1040 2300,1040 2377.95,962.05 U2.15@2377.95,813.78 2377.95,765.05 2383,760 2410,760 2420,770 2420,960 2475,1015 2480,1020 2840,1020 2997.44,862.56 U3.12@2997.44,798.03 2997.44,742.56 3025,715 3305,715 3370,650 J2.26@3500,650
A6: J2.25 U1.34 U2.14 U3.11 U11.10 | length 3744.8
  Top Layer w10: v1(1100,945) v1(1100,1274.41)
  Bottom Layer w10: U11.10@989.76,1274.41 v1(1100,1274.41) ; v1(1100,945) 1240,945 1292.52,892.48 ; U1.34@1292.52,805.91 1292.52,892.48 ; J2.25@3500,550 3370,550 3360,560 3360,630 3295,695 3020,695 2975.79,739.21 U3.11@2975.79,798.03 2975.79,859.21 2835,1000 2495,1000 2440,945 2440,760 2420,740 2375,740 2358.27,756.73 U2.14@2358.27,813.78 2358.27,951.73 2290,1020 1610,1020 1565,975 1375.04,975 1292.52,892.48
A7: J2.24 U1.35 U2.13 U3.10 U11.9 | length 3910.7
  Top Layer w10: v1(1075,1248.82) 1075,935 1269.02,740.98 v1(1324.02,740.98)
  Bottom Layer w10: U11.9@989.76,1248.82 v1(1075,1248.82) ; v1(1324.02,740.98) U1.35@1324.02,805.91 1324.02,884.02 1395,955 1575,955 1620,1000 2280,1000 2338.58,941.42 U2.13@2338.58,813.78 2338.58,746.42 2365,720 2430,720 2460,750 2460,930 2510,980 2830,980 2954.13,855.87 U3.10@2954.13,798.03 2954.13,735.87 3015,675 3285,675 3340,620 3340,480 3370,450 J2.24@3500,450
A8: J2.23 U1.36 U2.3 U3.4 | length 3082.6
  Top Layer w10: v1(1540,930) 1550,940 1665,940 v1(1700,905)
  Bottom Layer w10: U1.36@1355.51,805.91 1355.51,875.51 1410,930 v1(1540,930) ; v1(1700,905) 1735,905 1750,920 2110,920 2141.73,888.27 U2.3@2141.73,813.78 2141.73,743.27 2265,620 2480,620 2560,700 2560,855 2575,870 2805,870 2824.21,850.79 U3.4@2824.21,798.03 2824.21,715.79 2885,655 3275,655 3320,610 3320,400 3370,350 J2.23@3500,350
A9: J2.22 U1.37 U2.2 U3.3 | length 3120.2
  Top Layer w10: v1(1515,905) 1555,905 1570,920 1645,920 v1(1660,905)
  Bottom Layer w10: U1.37@1387.01,805.91 1387.01,867.01 1425,905 v1(1515,905) ; v1(1660,905) 1690,875 1740,875 1765,900 2100,900 2122.05,877.95 U2.2@2122.05,813.78 2122.05,732.95 2255,600 2490,600 2580,690 2580,840 2590,850 2800,850 2802.56,847.44 U3.3@2802.56,798.03 2802.56,707.44 2875,635 3265,635 3300,600 3300,390 3360,330 3360,260 3370,250 J2.22@3500,250
A10: J2.21 U1.38 U2.31 U3.28 | length 4399.9
  Top Layer w10: v1(1390,740) 1390,640 1415,615 1580,615 1610,645 1610,695 1620,705 1780,705 1790,695 1790,455 1760,425 1585,425 1550,390 1550,220 1565,205 v1(1565,175) ; v1(2195,155) 2200,150 2380,150 2407,177 2672,177 2735,240 v1(2735,260) 2735,415 2705,445 v1(2705,600)
  Bottom Layer w10: v1(1390,740) 1410,740 1418.5,748.5 U1.38@1418.5,805.91 ; v1(1565,175) 1570,170 1785,170 1795,180 1860,180 1891,149 2114,149 2140,175 ; U2.31@2122.05,286.22 2122,238 2140,220 2140,175 ; v1(2195,155) 2160,155 2140,175 ; v1(2705,600) 2935,600 2950,615 3255,615 3280,590 3280,380 3340,320 3340,180 3370,150 J2.21@3500,150 ; v1(2735,260) 2735,298 2738.97,301.97 U3.28@2759.25,301.97
A11: J2.1 U1.40 U2.1 U3.2 | length 3931.4
  Top Layer w10: v1(1540,720) 1540,860 1580,900 1620,900 1645,875 v1(1795,875) ; v1(2780.91,695) 2750,725.91 2750,865 2720,895 2720,1155 2695,1180 2695,1340 2800,1445 3025,1445 3070,1490 3070,1890 3200,2020 3340,2020 3370,2050 J2.1@3500,2050
  Bottom Layer w10: U1.40@1481.5,805.91 1481.5,748.5 1510,720 v1(1540,720) ; v1(1795,875) 1860,875 1865,880 2085,880 2102.36,862.64 U2.1@2102.36,813.78 2102.36,722.64 2245,580 2500,580 2550,630 2755,630 2780.91,655.91 v1(2780.91,695) U3.2@2780.91,798.03
A12: J2.2 U1.41 U2.12 U3.9 | length 4147.2
  Top Layer w10: v1@2940.01,705 2840,705 2770,775 2770,1175 2735,1210 2735,1320 2820,1405 3045,1405 3110,1470 3110,1820 3240,1950 J2.2@3500,1950
  Bottom Layer w10: U1.41@1512.99,805.91 1512.99,862.99 1630,980 2270,980 2318.9,931.1 U2.12@2318.9,813.78 2318.9,736.1 2355,700 2440,700 2480,740 2480,915 2525,960 2825,960 2932.48,852.52 U3.9@2932.48,798.03 2932.48,747.52 2935,745 2935,720 v1(2945,710)
A13: J2.3 U1.42 U2.4 U3.5 | length 3786.2
  Top Layer w10: v1(2850,730) 2790,790 2790,1230 2840,1280 3065,1280 3130,1345 3130,1720 3250,1840 3325,1840 3335,1850 J2.3@3500,1850
  Bottom Layer w10: U1.42@1544.49,805.91 1544.49,750.51 1550,745 1615,745 1635,765 1635,915 1660,940 2120,940 2161.42,898.58 U2.4@2161.42,813.78 2161.42,753.58 2275,640 2470,640 2540,710 2540,870 2560,890 2810,890 2845.87,854.13 U3.5@2845.87,798.03 2845.87,734.13 v1(2850,730)
A14: J2.4 U1.43 U2.5 U3.8 | length 3710.8
  Top Layer w10: v1(2910.83,730) 2910.83,749.17 2900,760 2850,760 2810,800 2810,1220 2850,1260 3075,1260 3150,1335 3150,1710 3200,1760 3325,1760 3335,1750 J2.4@3500,1750
  Bottom Layer w10: U1.43@1575.98,805.91 1576,891 1645,960 2130,960 2181.1,908.9 U2.5@2181.1,813.78 2181.1,763.9 2210,735 2275,735 2330,680 2450,680 2500,730 2500,900 2540,940 2818,940 2910.83,847.17 U3.8@2910.83,798.03 v1(2910.83,730)
A15: J2.5 U1.44 U7.1 | length 4106.2
  Top Layer w10: v1(1607.48,872.52) 1607.48,807.52 1645,770 1845,770 1905,710 1905,340 1885,320 v1(1885,263) 1885,225 2015,95 2980,95 2990,105 2990,210 3030,250 3030,820 3010,840 3010,1165 3170,1325 3170,1610 3210,1650 J2.5@3500,1650
  Bottom Layer w10: U1.44@1607.48,805.91 v1(1607.48,872.52) ; U7.1@1847.25,263 v1(1885,263)
B\U\S\A\C\K: J2.38 U1.20 | length 3588.5
  Top Layer w10: v1(1425,1425) 1430,1420 1430,1270 1490,1210 1490,890 1515,865 1515,675 v1(1530,660) ; v1(2865,1610) v1(2935,1610)
  Bottom Layer w10: U1.20@1355.51,294.09 1355.51,465.51 1530,640 v1(1530,660) ; v1(1425,1425) 1425,1495 1495,1565 2820,1565 v1(2865,1610) ; v1(2935,1610) 2935,1695 3090,1850 J2.38@3500,1850
B\U\S\R\E\Q\: J2.36 R5.2 U1.22 | length 3671
  Top Layer w10: v1@1365,1420 1390,1395 1390,1250 1450,1190 1450,860 1470,840 v1(1470,680) ; v1(2865,1670) v1(2985,1670)
  Bottom Layer w10: R5.2@1245.43,190 1245.43,225.43 1253,233 1285,233 1292.52,240.52 U1.22@1292.52,294.09 1292.52,502.52 v1(1470,680) ; v1(1365,1425) 1365,1495 1475,1605 2780,1605 2845,1670 v1(2865,1670) ; v1(2985,1670) 3350,1670 3370,1650 J2.36@3500,1650
CLK: J2.6 U1.1 U6.9 | length 2933.7
  Top Layer w10: v1(1945,830) 2020,905 2280,905 2350,975 v1(2350,1055) 2350,1170 2428.82,1248.82 v1(2500,1248.82) ; v1(3085,895) 3085,1180 3210,1305 3210,1395 3365,1550 J2.6@3500,1550
  Bottom Layer w10: U1.1@1705.91,707.48 1782.48,707.48 1905,830 v1(1945,830) ; v1(2350,1055) 2445,1055 2450,1060 2855,1060 3020,895 v1(3085,895) ; v1(2500,1248.82) U6.9@2589.76,1248.82
D0: J2.14 U1.9 U2.21 U3.18 U10.32 | length 4063.9
  Top Layer w10: v1(995,425) 1080,425 1150,355 v1(1440,355) ; v1(2130,395) 2245,395 2260,380 v1(2330,380) ; v1(3185,115) 3190,120 3190,525 3215,550 3275,550 3305,580 3305,685 3370,750 J2.14@3500,750
  Bottom Layer w10: U10.32@805.91,424.02 v1@995,424.02 ; v1(1440,355) 1485,400 1485,420 1525.51,460.51 1644.49,460.51 1649.49,455.51 U1.9@1705.91,455.51 1770.51,455.51 1780,465 2060,465 v1(2130,395) ; v1@2132.5,397.5 v1@2135,395 ; U2.21@2318.9,286.22 2318.9,368.9 v1(2330,380) 2355,405 2440,405 2480,365 2480,230 2535,175 2925,175 2975.79,225.79 U3.18@2975.79,301.97 2975.79,365.79 3010,400 3075,400 3185,290 v1(3185,115)
D1: J2.15 U1.10 U2.22 U3.19 U10.31 | length 3603.3
  Top Layer w10: v1(995,455.51) 1079.49,455.51 1155,380 1480,380 v1(1510,410) ; v1(2070,415) 2075,420 2250,420 2265,405 v1(2315,405) ; v1(3005,425) 3010,430 3010,540 v1(3005,545) ; v1(3215,435) 3215,450 3210,455 3210,515 3225,530 3285,530 3325,570 3325,605 3370,650 J2.15@3500,650
  Bottom Layer w10: U10.31@805.91,455.51 v1(995,455.51) ; v1(1510,410) 1540,440 1635,440 1650,425 U1.10@1704.92,425 ; U1.10@1705.91,424.02 1769.02,424.02 1790,445 2040,445 v1(2070,415) ; U2.22@2299.21,286.22 2299.21,389.21 v1(2315,405) 2335,425 2450,425 2500,375 2500,240 2545,195 2915,195 2954.13,234.13 U3.19@2954.13,301.97 2954.13,374.13 v1(3005,425) ; v1(3005,545) 3105,545 v1(3215,435)
D2: J2.12 U1.7 U2.23 U3.20 U10.30 | length 3808.8
  Top Layer w10: v1(995,487.01) 1117.99,487.01 1205,400 1450,400 v1(1460,410) ; v1(1990,518.5) 2008.5,518.5 2020,530 2175,530 2275,430 v1(2300,430) ; v1(2970,570) 2970,540 2990,520 2990,450 v1(2975,435) ; v1(3195,565) 3195,615 3190,620 3190,705 3210,725 3245,725 3305,785 3305,885 3370,950 J2.12@3500,950
  Bottom Layer w10: U10.30@805.91,487.01 v1(995,487.01) ; v1(1460,410) 1465,415 1465,430 1515,480 1560,480 1600,520 U1.7@1704.41,520 ; U1.7@1705.91,518.5 v1(1990,518.5) ; U2.23@2279.53,286.22 2279.53,409.53 v1(2300,430) 2315,445 2460,445 2520,385 2520,250 2555,215 2905,215 2932.48,242.48 U3.20@2932.48,301.97 2932.48,392.48 v1(2975,435) ; v1(2970,570) 3190,570 v1(3195,565)
D3: J2.8 U1.3 U2.25 U3.22 U10.29 | length 4735.6
  Top Layer w10: v1(995,518.5) 1116.5,518.5 1215,420 1425,420 v1(1440,435) ; v1(2055,555) 2185,555 v1(2285,455) ; v1(2695,1105) 2695,885 2730,850 v1(2730,465) ; v1(3160,1020) 3160,1165 3265,1270 3305,1270 3325,1290 3325,1305 3370,1350 J2.8@3500,1350
  Bottom Layer w10: U10.29@805.91,518.5 v1(995,518.5) ; v1(1440,435) 1460,455 1460,475 1629.49,644.49 U1.3@1705.91,644.49 1765.51,644.49 1825,585 2025,585 v1(2055,555) ; U2.25@2240.16,286.22 2240.16,410.16 v1(2285,455) 2295,465 2470,465 2540,395 2540,260 2565,235 2875,235 2889.17,249.17 U3.22@2889.17,301.97 2889.17,390.83 2815,465 v1(2730,465) ; v1(2695,1105) 2870,1105 2955,1020 v1(3160,1020)
D4: J2.7 U1.2 U2.26 U3.23 U10.28 | length 4646.2
  Top Layer w10: v1(995,550) 1115,550 1225,440 1410,440 v1(1435,465) ; v1(2570,1105) 2570,1070 2590,1050 2590,425 v1(2580,415) ; v1(3135,995) 3135,1170 3255,1290 3295,1290 3305,1300 3305,1385 3370,1450 J2.7@3500,1450
  Bottom Layer w10: U10.28@805.91,550 v1(995,550) ; v1(1435,465) 1435,480 1630.98,675.98 U1.2@1705.91,675.98 1764.02,675.98 1835,605 2045.94,605 2220.47,430.47 ; U2.26@2220.47,286.22 2220.47,430.47 ; v1(2570,1105) 2570,1102.47 2592.47,1080 2865,1080 2950,995 v1(3135,995) ; U3.23@2867.52,301.97 2867.52,382.48 2810,440 2715,440 2690,415 v1(2580,415) 2550,415 2480,485 2275,485 2220.47,430.47
D5: J2.9 U1.4 U2.27 U3.24 U10.27 | length 4442.4
  Top Layer w10: v1(1040,581.5) 1058.5,581.5 1070,570 1215,570 1250,535 1515,535 v1(1535,515) ; v1(2215,230) 2215,245 2245,275 2580,275 v1(2595,290) 2610,305 2610,1065 2600,1075 v1(2600,1105) ; v1(3325,1210) 3365,1250 J2.9@3500,1250
  Bottom Layer w10: U10.27@805.91,581.5 v1(1040,581.5) ; v1(1535,515) 1535,520 1627.99,612.99 U1.4@1705.91,612.99 1767.01,612.99 1815,565 2010,565 2045,530 2090,530 2200.79,419.21 U2.27@2200.79,286.22 2200.79,234.21 2205,230 v1(2215,230) ; v1(2595,290) 2725,420 2800,420 2845.87,374.13 U3.24@2845.87,301.97 ; v1@2600,1100 v1(2600,1105) 2600,1107.53 2622.47,1130 2655,1130 2675,1150 2880,1150 2965,1065 3220,1065 3325,1170 v1(3325,1210)
D6: J2.10 U1.5 U2.28 U3.25 U10.26 | length 4345.2
  Top Layer w10: v1(1100,612.99) 1232.01,612.99 1270,575 1575,575 v1(1600,550) ; v1(2240,215) 2240,240 2255,255 2600,255 v1(2604.64,259.64) 2630,285 v1(2630,1105) ; v1(3295,1060) 3295,1110 3335,1150 J2.10@3500,1150
  Bottom Layer w10: U10.26@805.91,612.99 v1(1100,612.99) ; v1(1600,550) 1631.5,581.5 U1.5@1705.91,581.5 1768.5,581.5 1805,545 2000,545 2035,510 2080,510 2181.1,408.9 U2.28@2181.1,286.22 2181.1,223.9 2200,205 2230,205 v1(2240,215) ; v1(2604.64,259.64) 2620,275 2620,285 2735,400 2790,400 2824.21,365.79 U3.25@2824.21,301.97 ; v1(2630,1105) 2660,1105 2685,1130 2875,1130 2960,1045 3280,1045 v1(3295,1060)
D7: J2.13 U1.8 U2.29 U3.26 U10.25 | length 3861.1
  Top Layer w10: v1(1070,644.49) 1070,599.99 1080,589.99 1225.01,589.99 1260,555 1535,555 v1(1602.99,487.01) ; v1(2315,230) 2335,230 2340,235 2617.53,235 v1@2651.26,268.74 ; v1(2650,270) 2650,570 v1(2655,575) ; v1(3220,580) 3220,620 3210,630 3210,695 3220,705 3260,705 3325,770 3325,805 3370,850 J2.13@3500,850
  Bottom Layer w10: U10.25@805.91,644.49 v1(1070,644.49) ; v1(1602.99,487.01) U1.8@1705.91,487.01 2072.99,487.01 2161.42,398.58 U2.29@2161.42,286.22 2161.42,213.58 2195,180 2265,180 v1(2315,230) ; v1(2650,270) 2650,285 2745,380 2780,380 2802.56,357.44 U3.26@2802.56,301.97 ; v1(2655,575) 2940,575 2960,595 3205,595 v1(3220,580)
DS_A: DS1.7 DS2.7 DS3.7 DS4.7 DS5.7 DS6.7 R14.2 | length 3720.5
  Top Layer w10: v1(270,1210) 330,1270 330,1375 400,1445 650,1445 750,1545 820,1545 1055,1780 1055,1820 v1(1195,1960) ; v1(1264.06,1960) DS1.7@1264.06,2091.22 ; v1(1564.06,1960) DS2.7@1564.06,2091.22 ; v1(1864.06,1960) DS3.7@1864.06,2091.22 ; v1(2164.06,1960) DS4.7@2164.06,2091.22 ; v1(2464.06,1960) DS5.7@2464.06,2091.22 ; v1@2764.01,1960.99 DS6.7@2764.06,2091.22
  Bottom Layer w10: v1(270,1210) R14.2@314.57,1210 ; v1(1195,1960) v1(1264.06,1960) v1(1564.06,1960) v1(1864.06,1960) v1(2164.06,1960) v1(2464.06,1960) v1(2764.01,1960)
DS_B: DS1.6 DS2.6 DS3.6 DS4.6 DS5.6 DS6.6 R15.2 | length 3955
  Top Layer w10: v1(270,1150) 350,1230 350,1365 410,1425 660,1425 760,1525 832.53,1525 1215,1907.47 v1(1215,1935) ; v1(1323.11,1935) DS1.6@1323.11,2091.22 ; v1(1623.11,1935) DS2.6@1623.11,2091.22 ; v1(1923.11,1935) DS3.6@1923.11,2091.22 ; v1(2223.11,1935) DS4.6@2223.11,2091.22 ; v1(2523.11,1935) DS5.6@2523.11,2091.22 ; v1(2823,1935) DS6.6@2823,2091
  Bottom Layer w10: v1(270,1150) R15.2@314.57,1150 ; v1(1215,1935) v1(1323.11,1935) v1(1623.11,1935) v1(1923.11,1935) v1(2223.11,1935) v1(2523.11,1935) v1(2823,1935)
DS_C: DS1.4 DS2.4 DS3.4 DS4.4 DS5.4 DS6.4 R16.2 | length 3716.7
  Top Layer w10: v1(270,1090) 370,1190 370,1355 420,1405 670,1405 770,1505 840,1505 1110,1775 v1(1180,1775) ; DS1.4@1264.06,1618.78 v1(1264.06,1750) ; DS2.4@1564.06,1618.78 v1(1564.06,1750) ; DS3.4@1864.06,1618.78 v1(1864.06,1750) ; DS4.4@2164.06,1618.78 v1(2164.06,1750) ; DS5.4@2464.06,1618.78 v1(2464.06,1750) ; DS6.4@2764.06,1618.78 v1(2764.06,1750)
  Bottom Layer w10: v1(270,1090) R16.2@314.57,1090 ; v1(1180,1775) 1205,1750 v1(1264.06,1750) v1(1564.06,1750) v1(1864.06,1750) v1(2164.06,1750) v1(2464.06,1750) v1(2764.06,1750)
DS_D: DS1.2 DS2.2 DS3.2 DS4.2 DS5.2 DS6.2 R18.2 | length 3415.6
  Top Layer w10: v1(270,970) 410,1110 410,1220 490,1300 625,1300 790,1465 970,1465 1000,1495 v1(1025,1495) ; v1(1145.94,1540.94) DS1.2@1145.94,1618.78 1145.94,1695.94 1175,1725 v1(1195,1725) ; DS2.2@1445.94,1618.78 v1(1445.94,1725) ; DS3.2@1745.94,1618.78 v1(1745.94,1725) ; DS4.2@2045.94,1618.78 v1(2045.94,1725) ; DS5.2@2345.94,1618.78 v1(2345.94,1725) ; DS6.2@2645.94,1618.78 v1(2645.94,1725)
  Bottom Layer w10: v1(270,970) R18.2@314.57,970 ; v1(1025,1495) 1070.94,1540.94 v1(1145.94,1540.94) ; v1@1195,1725.94 v1@2641.89,1725.94 ; v1@2645.94,1730 v1@2646,1730
DS_DP: DS1.5 DS2.5 DS3.5 DS4.5 DS5.5 DS6.5 R17.2 | length 3890.5
  Top Layer w10: v1(270,1030) 390,1150 390,1230 480,1320 615,1320 780,1485 850,1485 1115,1750 1190,1750 v1(1215,1775) ; DS1.5@1323.11,1618.78 v1(1323.11,1775) ; DS2.5@1623.11,1618.78 v1(1623.11,1775) ; DS3.5@1923.11,1618.78 v1(1923.11,1775) ; DS4.5@2223.11,1618.78 v1(2223.11,1775) ; DS5.5@2523.11,1618.78 v1(2523.11,1775) ; DS6.5@2823.11,1618.78 v1(2823.11,1775)
  Bottom Layer w10: v1(270,1030) R17.2@314.57,1030 ; v1(1215,1775) v1(1323.11,1775) v1(1623.11,1775) v1(1923.11,1775) v1(2223.11,1775) v1(2523.11,1775) v1(2823.11,1775)
DS_E: DS1.1 DS2.1 DS3.1 DS4.1 DS5.1 DS6.1 R11.2 | length 3136.5
  Top Layer w10: v1(520,1275) 630,1275 800,1445 985,1445 988,1442 1037,1442 1065,1470 1065,1515 1086.89,1536.89 DS1.1@1086.89,1618.78 1086.89,1691.89 1120,1725 v1(1140,1725) ; DS2.1@1386.89,1618.78 v1(1386.89,1699.78) ; DS3.1@1686.89,1618.78 v1(1686.89,1699.78) ; DS4.1@1986.89,1618.78 v1(1986.89,1699.78) ; DS5.1@2286.89,1618.78 v1(2286.89,1699.78) ; DS6.1@2586.89,1618.78 v1(2586.89,1699.78)
  Bottom Layer w10: R11.2@314.57,1390 314.57,1425.57 319,1430 435,1430 520,1345 v1(520,1275) ; v1(1140,1725) 1165.11,1699.89 v1@2587,1699.89
DS_F: DS1.9 DS2.9 DS3.9 DS4.9 DS5.9 DS6.9 R13.2 | length 3526.5
  Top Layer w10: v1(800,1655) 900,1655 1035,1790 1035,1835 1145.94,1945.94 v1(1145.94,1985) DS1.9@1145.94,2091.22 ; v1(1445.94,1985) DS2.9@1445.94,2091.22 ; v1(1745.94,1985) DS3.9@1745.94,2091.22 ; v1(2045.94,1985) DS4.9@2045.94,2091.22 ; v1(2345.94,1985) DS5.9@2345.94,2091.22 ; v1(2645.94,1985) DS6.9@2645.94,2091.22
  Bottom Layer w10: R13.2@314.57,1270 v1(270,1270) 245,1295 245,1420 475,1650 740,1650 745,1655 v1(800,1655) ; v1(1145.94,1985) v1(1445.94,1985) v1(1745.94,1985) v1(2045.94,1985) v1(2345.94,1985) v1(2645.94,1985)
DS_G: DS1.10 DS2.10 DS3.10 DS4.10 DS5.10 DS6.10 R12.2 | length 3285.1
  Top Layer w10: v1(770,1630) 770,1660 795,1685 900,1685 1010,1795 1010,1845 1110,1945 v1(1110,1985) 1086.89,2008.11 DS1.10@1086.89,2091.22 ; v1(1386.89,2010) DS2.10@1386.89,2091.22 ; v1(1686.89,2010) DS3.10@1686.89,2091.22 ; v1(1986.89,2010) DS4.10@1986.89,2091.22 ; v1(2286.89,2010) DS5.10@2286.89,2091.22 ; v1(2586.89,2010) DS6.10@2586.89,2091.22
  Bottom Layer w10: R12.2@314.57,1330 v1(270,1330) 270,1415 485,1630 v1(770,1630) ; v1(1110,1985) 1135,2010 v1(1386.89,2010) v1(1686.89,2010) v1(1986.89,2010) v1(2286.89,2010) v1(2586.89,2010)
FLASHC\E\: TP12.TP U2.30 U7.6 | length 367.7
  Bottom Layer w10: U7.6@1953.15,262.6 2047.6,262.6 2065,280 2065,330 2080,345 2132,345 2141.73,335.27 U2.30@2141.73,286.22 ; TP12.TP@2000,200 2000,262.6
GND: C1.1 C2.1 C3.1 C4.1 C5.1 C6.1 C7.1 C8.1 C9.1 C10.1 C11.1 C12.1 C13.1 C14.2 C15.2 C16.2 C17.1 C18.2 C19.2 C20.1 J1.4 J1.5 J1.6 J1.7 J1.8 J1.9 J2.32 R6.1 R7.1 R25.2 R26.2 SW40.1 SW40.2 SW41.1 SW41.2 SW42.1 SW42.2 SW43.1 SW43.2 TP14.TP U1.26 U2.24 U3.21 U4.10 U5.7 U6.7 U7.2 U8.10 U9.7 U10.2 U11.7 U12.5 U12.13 X1.2 | length 4093.1
  Top Layer w20: v1(143.5,1663.66) SW41.1@143.5,1713.58 ; v1(456.5,2013.5) SW40.2@456.5,2063.58 ; J1.6@599.46,1856.45 J1.7@599.46,2055 ; J1.6@614.65,1851.26 v1(614.65,1770) 645,1770 717.01,1770 ; J1.5@717.01,1841.42 717.01,1770 ; J1.4@748.5,1841.42 748.5,1770 717.01,1770 ; J1.8@975.63,1861.54 v1(975.63,2135.63) ; SW43.1@2943.5,2063.58 v1(2943.5,2113.5) ; v1(3201.42,1713.58) SW42.2@3256.5,1713.58
  Bottom Layer w10: R26.2@630.43,1325 630.43,1289.57 635,1285 v1(710,1285) ; v1(734,1770) 734,1865 C15.2@770.43,1865
  Bottom Layer w12: U2.24@2259.84,286.22 2259.84,235.16 v1(2270,225) ; U3.21@2910.83,301.97 v1(2910.83,409.17)
  Bottom Layer w14: v1(1151.77,1223.23) U11.7@1210.24,1223.23 ; U9.7@1389.76,1376.77 v1(1460,1376.77) 1506.77,1376.77 1549.57,1419.57 C9.1@1549.57,1460 ; v1(2356.77,1223.23) U5.7@2410.24,1223.23 ; v1(2761.77,1223.23) U6.7@2810.24,1223.23
  Bottom Layer w15: v1(255,1845) 267.42,1845 274.92,1837.5 U12.13@333.46,1837.5 ; v1(457.5,1812.5) U12.5@516.54,1812.5 ; TP14.TP@800,2100 860,2100 895.63,2135.63 v1(975.63,2135.63)
  Bottom Layer w20: v1(143.5,1663.66) C8.1@143.5,1808.94 ; v1(240,424.02) U10.2@294.09,424.02 ; R26.2@630.43,1325 C20.1@630.43,1391.06 ; R25.2@709.57,1325 C12.1@709.57,1391.06 ; v1(710,1285) R25.2@710,1324.57 ; C15.2@770.43,1865 C16.2@834.57,1865 ; U8.10@782.2,1011 v1(782.2,987.2) 782.2,927.8 790,920 C10.1@839.57,920 ; v1(810,1590) C13.1@850.63,1590 ; C14.2@1040.43,1805 v1(1080,1805) ; v1(1108,460) 1135.01,487.01 U1.26@1194.09,487.01 ; v1(1220.43,1410.43) C11.1@1220.43,1460 ; C1.1@1745.43,300 v1(1800,300) U7.2@1846.85,300 ; v1(1850,1300) X1.2@1950,1300 ; C2.1@1954.57,760 1954.57,715.43 v1(1975,695) ; C7.1@2030,375.43 v1(2030,415) ; v1(2070,1100) R7.1@2114.57,1100 ; R6.1@2385.43,1100 v1(2430,1100) ; v1(2420.43,1415.43) C5.1@2420.43,1460 ; v1(2665,660) C3.1@2665,704.57 ; C6.1@2749.57,1460 v1(2749.57,1509.57) ; C4.1@3085,1514.57 v1(3085,1350) U4.10@3144.49,1350 ; v1(3290,1240) 3300,1250 J2.32@3500,1250
  Bottom Layer w40: C18.2@975.63,1995 v1(975.63,2135.63)
  other v1: 655,1770 599.46,1990